# Altium PCB plata_verhn.PcbDoc
Units mm, origin at the board's own origin, x right, y up, seen from the top; angles counter-clockwise.
Board outline 160 x 60 mm, 2 copper layers (Top Layer, Bottom Layer); 17 components, 18 nets, 73 pads, 0 vias.
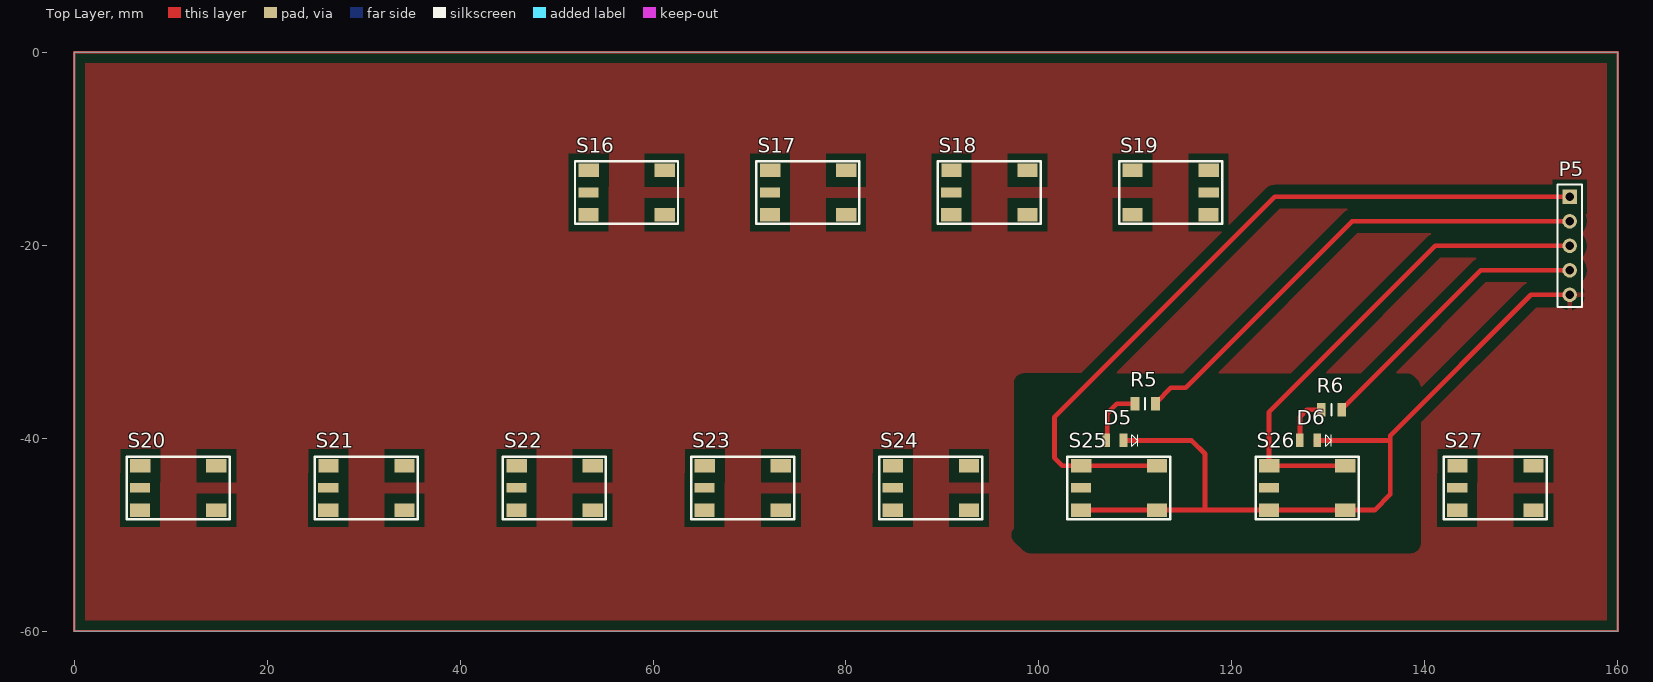
[diagram p0: Top Layer view]
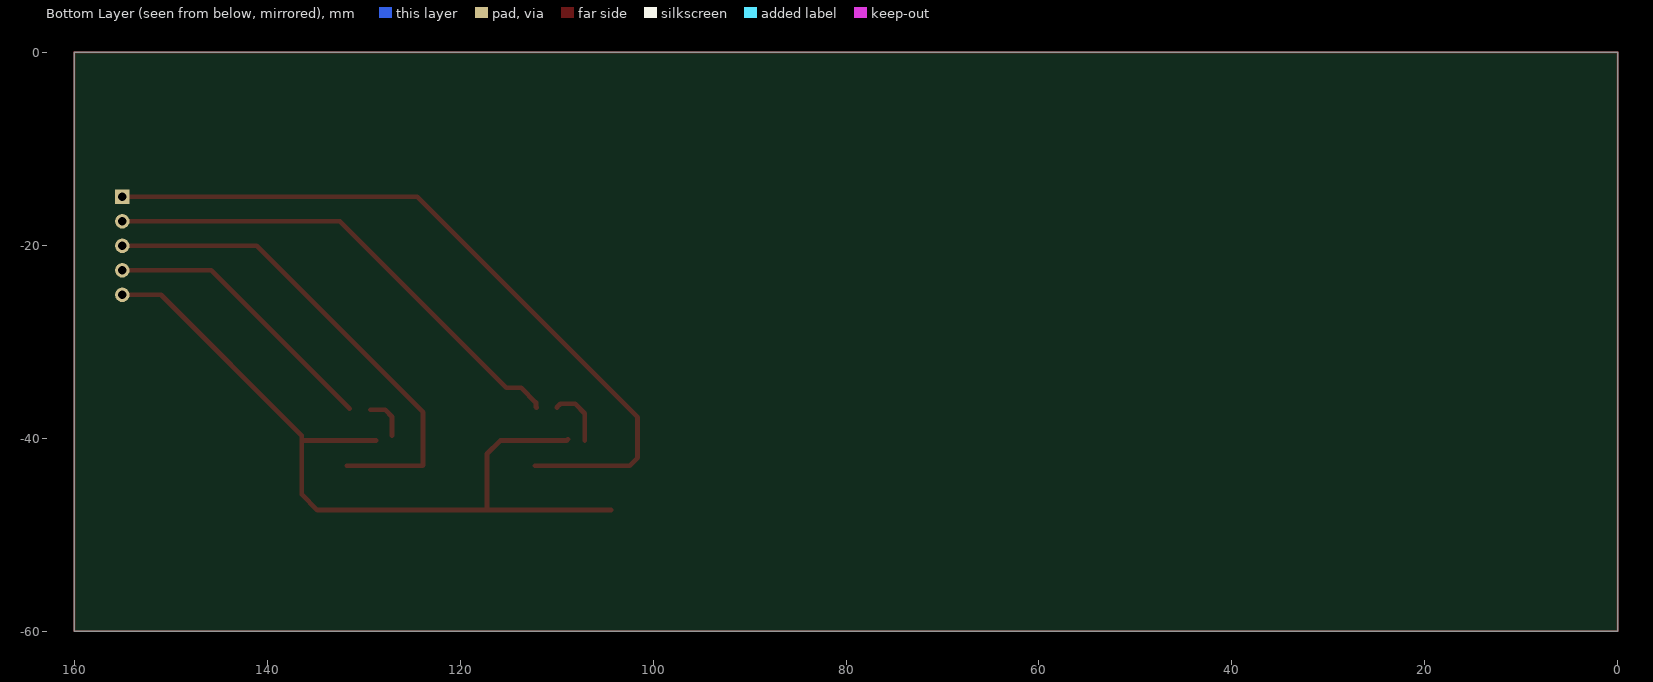
[diagram p1: Bottom Layer view, seen from below]

## Layer stack, top to bottom
Top Solder: solder mask 0.0102, Solder Resist, Dk 3.5
Top Layer: signal copper 0.0356
Dielectric 1: dielectric 0.32, FR-4, Dk 4.8
Bottom Layer: signal copper 0.0356
Bottom Solder: solder mask 0.0102, Solder Resist, Dk 3.5

## Board outline
0,-60 160,-60 160,0 0,0

## Design rules (kind name [scope] priority, off if disabled: settings)
Clearance [All] p1: gap=0.8
PlaneConnect [All] p1: planeconnectstyle=Relief reliefexpansion=0.6 reliefentries=4 reliefconductorwidth=0.5 reliefairgap=0.8
PolygonConnect [All] p1: connectstyle=Relief reliefconductorwidth=0.5 reliefentries=4 polygonreliefangle="90 Angle" airgapwidth=0.8
RoutingVias [All] p1: holewidth=0.711 width=1.27 viastyle="Through Hole" minholewidth=0.711 minwidth=1.27 maxholewidth=0.711 maxwidth=1.27
SolderMaskExpansion [All] p1: expansion=0.102
Width [All] p1: maxlimit=0.5 minlimit=0.5 preferedwidth=0.5
28 further rules are at their usual default settings.

## Components (designator, comment, footprint, x,y, rotation, side; value= is the part's Value field where it differs from the comment)
D5 "LED0" LED0805 107.188,-40.259 r0 top
D6 "LED0" LED0805 127.254,-40.259 r0 top
P5 "Header 5" HDR1X5 155,-15 r270 top
R5 "250" 6-0805_N 110.998,-36.449 r0 top
R6 "250" 6-0805_N 130.302,-37.084 r0 top
S16 "У" STMW 57.25,-14.56 r0 top
S17 "К" STMW 76.05,-14.56 r0 top
S18 "А" STMW 94.85,-14.56 r0 top
S19 "З" STMW 113.65,-14.56 r180 top
S20 "К" STMW 10.78,-45.17 r0 top locked
S21 "О" STMW 30.28,-45.17 r0 top locked
S22 "Р" STMW 49.78,-45.17 r0 top locked
S23 "О" STMW 69.28,-45.17 r0 top locked
S24 "Л" STMW 88.78,-45.17 r0 top locked
S25 "Е" STMW 108.28,-45.17 r0 top locked
S26 "В" STMW 127.78,-45.17 r0 top locked
S27 "Ы" STMW 147.28,-45.17 r0 top locked

## Footprints (in the part's own frame and the unit in brackets; to place one, negate y for a bottom-side part, rotate by r counter-clockwise, add the part's x,y. Pads: shape width x height; smd on the part's side, far side on the other; paste and mask are expansions set on the pad)
6-0805_N [mm] "Chip Resistor, Body 2.0x1.2mm, IPC Medium Density"
  rect 0.9x1.4 smd: 1(-1.039,0.009) 2(1.078,-0.007)
  silkscreen extent 0,-0.6 0,0.6, body extent -1.07,-0.7 1.07,0.7, height 0.7
HDR1X5 [mm] "Connector; Header; 5 Position"
  rect 1.5x1.5 hole 0.9: 1(0,0)
  round 1.5 hole 0.9: 2(2.54,0) 3(5.08,0) 4(7.62,0) 5(10.16,0)
  silkscreen extent -1.27,-1.27 11.43,1.27
LED0805 [mm] "Chip Resistor, Body 2.0x1.2mm, IPC High Density"
  rect 0.8x1.4 smd: 1(-0.219,0.008) 2(1.578,0.008)
  silkscreen extent 2.45,-0.6 3.05,0.57, body extent -0.43,-0.72 1.78,0.72, height 1.4
STMW [mm]
  rect 2.1x1 smd: 0(-3.938,0)
  rect 2.1x1.4 smd: 1(-3.912,2.3) 1(3.962,2.3) 2(-3.938,-2.3) 2(3.962,-2.3)
  silkscreen extent -5.34,-3.25 5.34,3.25

## Part data
D5 D6: "Typical INFRARED GaAs LED"
P5: "Header, 5-Pin"
R5 R6: library part Res2, "Resistor"
S16 S17 S18 S19 S20 S21 S22 S23 S24 S25 S26 S27: library part STMW, "Switch"

## Nets (pads, with @x,y where several pads share a name; then routed paths per layer and width w, separated by ;. In a path a pad name is that pad's centre, name@x,y a point inside that pad or via, vN(x,y) a via of type N, cw(c..) or ccw(c..) an arc to the next point about the centre after c; other vN are vias at no path point)
A1: P5.3 S26.1 | length 51.7
  Top Layer w0.5: S26.1@131.743,-42.87 123.868,-42.87 123.825,-42.827 123.825,-37.338 141.083,-20.08 P5.3
A2: 
A3: P5.1 S25.1 | length 78
  Top Layer w0.5: S25.1@112.242,-42.87 104.368,-42.87 102.433,-42.87 101.6,-42.037 101.6,-37.846 124.446,-15 P5.1
A4: 
GND: D5.2 D6.2 P5.5 S25.2 S26.2 | length 86
  Top Layer w0.5: S25.2@104.342,-47.47 112.242,-47.47 117.221,-47.47 ; D5.2@108.819,-40.132 108.946,-40.259 115.824,-40.259 117.221,-41.656 117.221,-47.47 ; D6.2@128.679,-40.259 136.398,-40.259 ; P5.5 150.989,-25.16 136.398,-39.751 136.398,-40.259 ; 117.221,-47.47 123.843,-47.47 131.743,-47.47 134.775,-47.47 136.398,-45.847 136.398,-40.259
LED1: P5.4 R6.2 | length 29.5
  Top Layer w0.5: R6.2@131.445,-36.957 145.782,-22.62 P5.4
LED2: 
LED3: P5.2 R5.2 | length 51.2
  Top Layer w0.5: R5.2@112.076,-36.837 112.141,-36.772 112.141,-36.322 113.665,-34.798 115.189,-34.798 132.447,-17.54 P5.2
LED4: 
NetD1_1: 
NetD1_2: 
NetD2_1: 
NetD3_1: 
NetD4_1: 
NetD5_1: D5.1 R5.1 | length 6.3
  Top Layer w0.5: D5.1@107.067,-40.259 107.067,-37.459 108.077,-36.449 109.587,-36.449 R5.1@109.959,-36.821
NetD6_1: D6.1 R6.1 | length 4.5
  Top Layer w0.5: D6.1@127.052,-39.751 127.052,-37.794 127.771,-37.075 R6.1
NetP1_1: 
NetP2_1: 
pads on no net: S16.0 S16.1 S16.2 S17.0 S17.1 S17.2 S18.0 S18.1 S18.2 S19.0 S19.1 S19.2 S20.0 S20.1 S20.2 S21.0 S21.1 S21.2 S22.0 S22.1 S22.2 S23.0 S23.1 S23.2 S24.0 S24.1 S24.2 S25.0 S26.0 S27.0 S27.1 S27.2
copper on no net: | length 440
  Top Layer w0.254: 0,-60 160,-60 160,0 0,0 0,-60

## Polygon pours and split planes (outlines as drawn)
GND on Top Layer "Bottom Layer-No Net" (solid, pour order 19): 0,0 160,0 160,-60 0,-60